# Altium PCB TU_ADV_PCB.PcbDoc (part 2 of 2)
Units mm, origin at the board's own origin, x right, y up, seen from the top; angles counter-clockwise.
Board outline 184 x 161.42 mm, 2 copper layers (Top Layer, Bottom Layer); 166 components, 184 nets, 467 pads, 141 vias.
Unrouted connection lines stored in the file: 268.
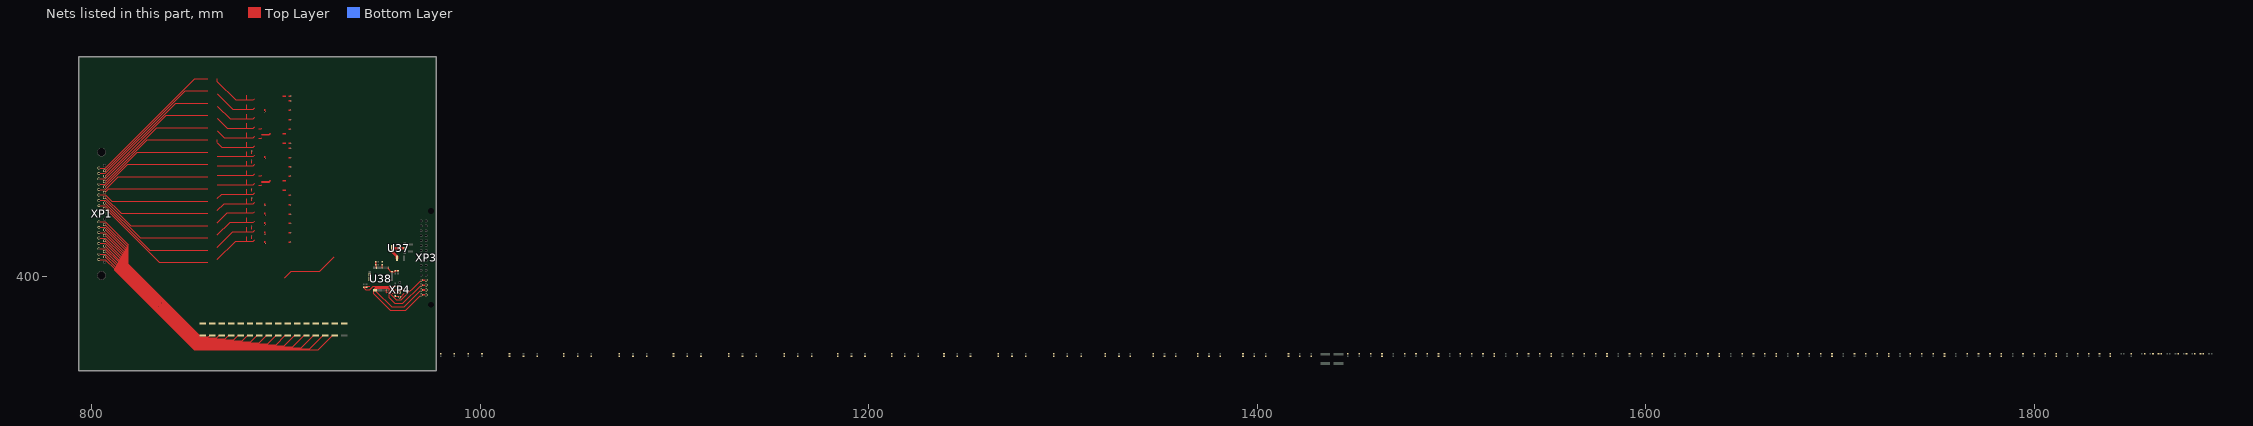
[diagram p2: the nets of this part, all layers, seen from the top]

## Via types
v1: diameter 0.7, hole 0.35, Top Layer to Bottom Layer, tented both sides, 138 vias
v2: diameter 0.85, hole 0.4, Top Layer to Bottom Layer, tented both sides, 3 vias

## Nets (pads, with @x,y where several pads share a name; then routed paths per layer and width w, separated by ;. In a path a pad name is that pad's centre, name@x,y a point inside that pad or via, vN(x,y) a via of type N, cw(c..) or ccw(c..) an arc to the next point about the centre after c; other vN are vias at no path point) (continued)
IDI_1: R87.1 XP1.20 | length 144.1
  Top Layer w0.3: XP1.20@803.76,408.714 807.174,408.714 811.907,403.982 811.907,403.273 852.824,362.356 916.711,362.356 924.061,369.706 R87.1@925.211,369.706
IDI_2: R91.1 XP1.2 | length 137
  Top Layer w0.3: XP1.2@806.6,410.099 807.174,410.099 812.407,404.867 812.407,403.48 853.031,362.856 912.361,362.856 919.211,369.706 R91.1@920.361,369.706
IDI_3: R95.1 XP1.21 | length 135.5
  Top Layer w0.3: XP1.21@803.76,411.484 807.174,411.484 812.907,405.752 812.907,403.687 853.238,363.356 908.011,363.356 914.361,369.706 R95.1@915.511,369.706
IDI_4: R99.1 XP1.3 | length 128.4
  Top Layer w0.3: XP1.3@806.6,412.869 807.174,412.869 813.407,406.637 813.407,403.894 853.445,363.856 903.661,363.856 909.511,369.706 R99.1@910.661,369.706
IDI_5: R103.1 XP1.22 | length 126.9
  Top Layer w0.3: XP1.22@803.76,414.254 807.174,414.254 813.907,407.522 813.907,404.101 853.652,364.356 899.311,364.356 904.661,369.706 R103.1@905.811,369.706
IDI_6: R107.1 XP1.4 | length 119.8
  Top Layer w0.3: XP1.4@806.6,415.639 807.174,415.639 814.407,408.407 814.407,404.308 853.859,364.856 894.961,364.856 899.811,369.706 R107.1@900.961,369.706
IDI_7: R111.1 XP1.23 | length 118.4
  Top Layer w0.3: XP1.23@803.76,417.024 807.174,417.024 814.907,409.292 814.907,404.515 854.066,365.356 890.611,365.356 894.961,369.706 R111.1@896.111,369.706
IDI_8: R115.1 XP1.5 | length 111.2
  Top Layer w0.3: XP1.5@806.6,418.409 807.174,418.409 815.407,410.177 815.407,404.723 854.273,365.856 886.261,365.856 890.111,369.706 R115.1@891.261,369.706
IDI_9: R119.1 XP1.24 | length 109.8
  Top Layer w0.3: XP1.24@803.76,419.794 807.174,419.794 815.907,411.062 815.907,404.93 854.48,366.356 881.911,366.356 885.261,369.706 R119.1@886.411,369.706
IDI_10: R123.1 XP1.6 | length 102.6
  Top Layer w0.3: XP1.6@806.6,421.179 807.174,421.179 816.407,411.947 816.407,405.137 854.688,366.856 877.561,366.856 880.411,369.706 R123.1@881.561,369.706
IDI_11: R127.1 XP1.25 | length 101.2
  Top Layer w0.3: XP1.25@803.76,422.564 807.174,422.564 816.907,412.832 816.907,405.344 854.895,367.356 873.211,367.356 875.561,369.706 R127.1@876.711,369.706
IDI_12: R131.1 XP1.7 | length 94
  Top Layer w0.3: XP1.7@806.6,423.949 807.174,423.949 817.407,413.717 817.407,405.551 855.102,367.856 868.861,367.856 870.711,369.706 R131.1@871.861,369.706
IDI_13: R135.1 XP1.26 | length 92.6
  Top Layer w0.3: XP1.26@803.76,425.334 807.174,425.334 817.907,414.602 817.907,405.758 855.309,368.356 864.511,368.356 865.861,369.706 R135.1@867.011,369.706
IDI_14: R139.1 XP1.8 | length 85.5
  Top Layer w0.3: XP1.8@806.6,426.719 807.174,426.719 818.407,415.487 818.407,405.965 855.516,368.856 860.161,368.856 861.011,369.706 R139.1@862.161,369.706
IDI_15: R143.1 XP1.27 | length 83.7
  Top Layer w0.3: XP1.27@803.76,428.104 807.174,428.104 818.907,416.372 818.907,406.172 855.373,369.706 R143.1@857.311,369.706
IDO_0: XP1.11 | length 64.8
  Top Layer w0.3: XP1.11@806.6,435.029 807.174,435.029 834.933,407.27 859.923,407.27
IDO_1: XP1.30 | length 65.6
  Top Layer w0.3: XP1.30@803.76,436.414 807.174,436.414 830.018,413.57 859.923,413.57
IDO_2: XP1.12 | length 60.7
  Top Layer w0.3: XP1.12@806.6,437.799 807.174,437.799 825.103,419.87 859.923,419.87
IDO_3: XP1.31 | length 61.6
  Top Layer w0.3: XP1.31@803.76,439.184 807.174,439.184 820.188,426.17 859.923,426.17
IDO_4: XP1.13 | length 56.7
  Top Layer w0.3: XP1.13@806.6,440.569 807.174,440.569 815.273,432.47 859.923,432.47
IDO_5: XP1.32 | length 57.5
  Top Layer w0.3: XP1.32@803.76,441.954 807.174,441.954 810.358,438.77 859.923,438.77
IDO_6: XP1.14 | length 54
  Top Layer w0.3: XP1.14@806.6,443.339 807.174,443.339 808.905,445.07 859.923,445.07
IDO_7: XP1.33 | length 58.9
  Top Layer w0.3: XP1.33@803.76,444.724 807.174,444.724 813.82,451.37 859.923,451.37
IDO_8: XP1.15 | length 58.1
  Top Layer w0.3: XP1.15@806.6,446.109 807.174,446.109 818.735,457.67 859.923,457.67
IDO_9: XP1.34 | length 63
  Top Layer w0.3: XP1.34@803.76,447.494 807.174,447.494 823.65,463.97 859.923,463.97
IDO_10: XP1.16 | length 62.2
  Top Layer w0.3: XP1.16@806.6,448.879 807.174,448.879 828.565,470.27 859.923,470.27
IDO_11: XP1.35 | length 67.1
  Top Layer w0.3: XP1.35@803.76,450.264 807.174,450.264 833.48,476.57 859.923,476.57
IDO_12: XP1.17 | length 66.3
  Top Layer w0.3: XP1.17@806.6,451.649 807.174,451.649 838.395,482.87 859.923,482.87
IDO_13: XP1.36 | length 71.1
  Top Layer w0.3: XP1.36@803.76,453.034 807.174,453.034 843.31,489.17 859.923,489.17
IDO_14: XP1.18 | length 70.3
  Top Layer w0.3: XP1.18@806.6,454.419 807.174,454.419 848.225,495.47 859.923,495.47
IDO_15: XP1.37 | length 75.2
  Top Layer w0.3: XP1.37@803.76,455.804 807.174,455.804 853.14,501.77 859.923,501.77
NetPS1_2: R5.2 | length 27.3
  Top Layer w0.6: 864.823,501.77 864.823,500.27 874.198,490.895 879.781,490.895 ; 879.781,493.32 879.781,490.895 ; 884.034,491.595 883.334,490.895 882.534,490.895 879.781,490.895
NetPS2_2: R10.2 | length 26.4
  Top Layer w0.6: 864.823,493.97 872.748,486.045 882.534,486.045 883.334,486.045 884.034,486.745 ; 879.781,486.045 879.781,488.47
  Top Layer w0.7: 901.428,490.325 v1(902.606,490.325)
NetPS3_2: R15.2 | length 24.6
  Top Layer w0.6: 864.823,487.67 871.298,481.195 882.534,481.195 883.334,481.195 884.034,481.895 ; 879.781,481.195 879.781,483.62
NetPS4_2: R20.2 | length 24
  Top Layer w0.6: 864.823,481.37 869.848,476.345 882.534,476.345 883.334,476.345 884.034,477.045 ; 879.781,476.345 879.781,478.77
NetPS5_2: R25.2 | length 23.4
  Top Layer w0.6: 864.823,475.07 868.398,471.495 882.534,471.495 883.334,471.495 884.034,472.195 ; 879.781,471.495 879.781,473.92
NetPS6_2: R30.2 | length 25.1
  Top Layer w0.6: 864.823,468.77 866.948,466.645 882.534,466.645 883.334,466.645 884.034,467.345 ; 864.823,469.194 864.823,470.27 ; 879.781,466.645 879.781,469.07
  Top Layer w0.7: 901.428,466.075 v1(902.606,466.075)
NetPS7_2: R35.2 | length 21.9
  Top Layer w0.6: 864.823,461.795 882.534,461.795 883.334,461.795 884.034,462.495 ; 879.781,461.795 879.781,464.22
NetPS8_2: R40.2 | length 21.9
  Top Layer w0.6: 864.823,456.945 882.534,456.945 883.334,456.945 884.034,457.645 ; 879.781,456.945 879.781,459.37
NetPS9_2: R45.2 | length 21.9
  Top Layer w0.6: 864.823,452.095 882.534,452.095 883.334,452.095 884.034,452.795 ; 879.781,452.095 879.781,454.52
NetPS10_2: R50.2 | length 23.1
  Top Layer w0.6: 864.823,447.245 882.534,447.245 883.334,447.245 884.034,447.945 ; 879.781,447.245 879.781,449.67
  Top Layer w0.7: 901.428,441.825 v1(902.606,441.825)
NetPS11_2: R55.2 | length 22.8
  Top Layer w0.6: 864.823,440.27 866.948,442.395 882.534,442.395 883.334,442.395 884.034,443.095 ; 879.781,442.395 879.781,444.82
NetPS12_2: R60.2 | length 23.4
  Top Layer w0.6: 864.823,433.97 868.398,437.545 882.534,437.545 883.334,437.545 884.034,438.245 ; 879.781,437.545 879.781,439.97
NetPS13_2: R65.2 | length 24
  Top Layer w0.6: 864.823,427.67 869.848,432.695 882.534,432.695 883.334,432.695 884.034,433.395 ; 879.781,432.695 879.781,435.12
NetPS14_2: R70.2 | length 24.6
  Top Layer w0.6: 864.823,421.37 871.298,427.845 882.534,427.845 883.334,427.845 884.034,428.545 ; 879.781,427.845 879.781,430.27
NetPS15_2: R75.2 | length 25.2
  Top Layer w0.6: 864.823,415.07 872.748,422.995 882.534,422.995 883.334,422.995 884.034,423.695 ; 879.781,422.995 879.781,425.42
NetPS16_2: R80.2 | length 25.8
  Top Layer w0.6: 864.823,408.77 874.198,418.145 882.534,418.145 883.334,418.145 884.034,418.845 ; 879.781,418.145 879.781,420.57
NetR2_1: R2.1 R4.2
NetR2_2: R2.2
NetR3_2: R3.2
NetR7_1: R7.1 R9.2
NetR7_2: R7.2
NetR8_2: R8.2
NetR12_1: R12.1 R14.2 | length 2.4
  Top Layer w0.7: 901.428,485.475 v1(902.606,485.475) ; 901.428,492.865 v1(902.606,492.865)
NetR12_2: R12.2 | length 1.6
  Top Layer w0.7: 898.453,492.865 900.028,492.865
NetR13_2: R13.2
NetR17_1: R17.1 R19.2 | length 1.2
  Top Layer w0.7: v1(889.108,484.868) 889.108,486.045
NetR17_2: R17.2
NetR18_2: R18.2 | length 1.2
  Top Layer w0.7: 901.428,480.625 v1(902.606,480.625)
NetR22_1: R22.1 R24.2
NetR22_2: R22.2 | length 1.2
  Top Layer w0.7: 901.428,475.775 v1(902.606,475.775)
NetR23_2: R23.2 | length 1.6
  Top Layer w0.6: 886.034,476.095 887.284,476.095 887.534,476.345
NetR27_1: R27.1 R29.2 | length 4.7
  Top Layer w0.8: 887.534,472.895 889.108,472.895 891.383,472.895 891.953,473.465
NetR27_2: R27.2 | length 1.6
  Top Layer w0.6: 886.034,471.245 887.284,471.245 887.534,471.495
NetR28_2: R28.2 | length 1.6
  Top Layer w0.7: 898.453,473.465 900.028,473.465
NetR32_1: R32.1 R34.2 | length 2.4
  Top Layer w0.7: 901.428,461.225 v1(902.606,461.225) ; 901.428,468.615 v1(902.606,468.615)
NetR32_2: R32.2 | length 1.6
  Top Layer w0.7: 898.453,468.615 900.028,468.615
NetR33_2: R33.2
NetR37_1: R37.1 R39.2 | length 1.2
  Top Layer w0.7: v1(889.108,460.618) 889.108,461.795
NetR37_2: R37.2
NetR38_2: R38.2 | length 1.2
  Top Layer w0.7: 901.428,456.375 v1(902.606,456.375)
NetR42_1: R42.1 R44.2
NetR42_2: R42.2 | length 1.2
  Top Layer w0.7: 901.428,451.525 v1(902.606,451.525)
NetR43_2: R43.2 | length 1.6
  Top Layer w0.6: 886.034,451.845 887.284,451.845 887.534,452.095
NetR47_1: R47.1 R49.2 | length 4.7
  Top Layer w0.8: 887.534,448.645 889.108,448.645 891.383,448.645 891.953,449.215
NetR47_2: R47.2 | length 1.6
  Top Layer w0.6: 886.034,446.995 887.284,446.995 887.534,447.245
NetR48_2: R48.2 | length 1.6
  Top Layer w0.7: 898.453,449.215 900.028,449.215
NetR52_1: R52.1 R54.2 | length 1.2
  Top Layer w0.7: 901.428,436.975 v1(902.606,436.975)
NetR52_2: R52.2 | length 1.6
  Top Layer w0.7: 898.453,444.365 900.028,444.365
NetR53_2: R53.2
NetR57_1: R57.1 R59.2 | length 1.2
  Top Layer w0.7: v1(889.108,436.368) 889.108,437.545
NetR57_2: R57.2
NetR58_2: R58.2 | length 1.2
  Top Layer w0.7: 901.428,432.125 v1(902.606,432.125)
NetR62_1: R62.1 R64.2 | length 1.2
  Top Layer w0.7: v1(889.108,431.518) 889.108,432.695
NetR62_2: R62.2
NetR63_2: R63.2 | length 1.2
  Top Layer w0.7: 901.428,427.275 v1(902.606,427.275)
NetR67_1: R67.1 R69.2 | length 1.2
  Top Layer w0.7: v1(889.108,426.668) 889.108,427.845
NetR67_2: R67.2
NetR68_2: R68.2 | length 1.2
  Top Layer w0.7: 901.428,422.425 v1(902.606,422.425)
NetR72_1: R72.1 R74.2 | length 1.2
  Top Layer w0.7: v1(889.108,421.818) 889.108,422.995
NetR72_2: R72.2
NetR73_2: R73.2 | length 1.2
  Top Layer w0.7: 901.428,417.575 v1(902.606,417.575)
NetR77_1: R77.1 R79.2 | length 1.2
  Top Layer w0.7: v1(889.108,416.968) 889.108,418.145
NetR77_2: R77.2
NetR78_2: R78.2
NetR81_1: R81.1 R84.1
NetR83_2: R83.2 R84.2
NetR85_1: R85.1 R88.1
NetR87_2: R87.2 R88.2
NetR89_1: R89.1 R92.1 | length 31.5
  Top Layer w0.3: 899.511,399.376 902.886,402.751 917.535,402.751 925.035,410.251
  Top Layer w0.6: 882.534,463.195 v1(882.534,464.622)
NetR91_2: R91.2 R92.2
NetR93_1: R93.1 R96.1 | length 1.4
  Top Layer w0.6: 882.534,443.795 v1(882.534,445.222)
NetR95_2: R95.2 R96.2
NetR97_1: R97.1 R100.1 | length 1.4
  Top Layer w0.6: 882.534,424.395 v1(882.534,425.822)
NetR99_2: R99.2 R100.2
NetR101_1: R101.1 R104.1
NetR103_2: R103.2 R104.2
NetR105_1: R105.1 R108.1
NetR107_2: R107.2 R108.2
NetR109_1: R109.1 R112.1
NetR111_2: R111.2 R112.2
NetR113_1: R113.1 R116.1
NetR115_2: R115.2 R116.2
NetR117_1: R117.1 R120.1
NetR119_2: R119.2 R120.2
NetR121_1: R121.1 R124.1
NetR123_2: R123.2 R124.2
NetR125_1: R125.1 R128.1
NetR127_2: R127.2 R128.2
NetR129_1: R129.1 R132.1
NetR131_2: R131.2 R132.2
NetR133_1: R133.1 R136.1
NetR135_2: R135.2 R136.2
NetR137_1: R137.1 R140.1
NetR139_2: R139.2 R140.2
NetR141_1: R141.1 R144.1
NetR143_2: R143.2 R144.2
NetR145_2: R145.2 U38.19
NetR146_2: R146.2 U38.20
NetR151_2: R151.2 U38.7 | length 1.6
  Top Layer w0.3: U38.7@949.681,404.5 R151.2@949.681,406.125
NetU34_1: U38.26
NetU34_10: U38.27
NetU34_11: U38.29
S2: U38.25
S3: U38.24
SPI1_MOSI: R148.2 U38.23
SPI1_SCK: R147.2 U38.21
SPI2_MISO: U38.35 XP3.3 XP3.30 | length 36.8
  Top Layer w0.3: U38.35@946.181,393 946.181,393.745 946.386,393.95 952.976,393.95 953.181,393.745 953.181,388.97 956.032,386.119 960.19,386.119 XP3.30@969.66,395.589
  Top Layer w0.8: XP3.30@969.681,395.589 XP3.3@972.221,395.589
SPI2_MOSI: U38.36 XP3.2 XP3.31 | length 33.2
  Top Layer w0.3: U38.36@946.681,393 946.681,392.255 954.598,384.338 960.97,384.338 XP3.31@969.681,393.049
  Top Layer w0.8: XP3.31@969.681,393.049 XP3.2@972.221,393.049
SPI2_NSS: U38.33 XP3.1 XP3.32 | length 35.7
  Top Layer w0.3: U38.33@945.181,393 945.181,391.236 953.861,382.557 961.729,382.557 XP3.32@969.681,390.509
  Top Layer w0.8: XP3.32@969.681,390.509 XP3.1@972.221,390.509
SPI2_SCK: U38.34 XP3.4 XP3.29 | length 36.4
  Top Layer w0.3: U38.34@945.681,393 945.681,393.952 946.179,394.45 953.183,394.45 953.681,393.952 953.681,390.989 956.77,387.9 959.452,387.9 XP3.29@969.681,398.129
  Top Layer w0.8: XP3.29@969.681,398.129 XP3.4@972.221,398.129
SWCLK: R149.2 U38.49 XP4.2 | length 5.6
  Top Layer w0.3: U38.49@954.681,395 957.756,395
  Top Layer w0.6: R149.2@956.306,395 958.065,395 XP4.2@958.635,394.43
SWDIO: R150.1 U38.46 XP4.3 | length 11.1
  Top Layer w0.3: U38.46@951.681,393 951.681,391.975 952.337,391.32 v1(952.381,391.32)
  Top Layer w0.6: v1(954.481,391.32) R150.1@956.306,391.32 ; R150.1@956.306,391.32 958.065,391.32 ; R150.1@956.306,391.32 958.065,391.32 ; 958.065,391.32 XP4.3@958.635,391.89 958.065,391.32
  Bottom Layer w0.6: v1(952.381,391.32) v1(954.481,391.32)
VCC_3.3V_CLEAR: C3.2 C4.2 C6.2 C7.2 C8.2 C9.2 C10.2 R82.1 R86.1 R90.1 R94.1 R98.1 R102.1 R106.1 R110.1 R114.1 R118.1 R122.1 R126.1 R130.1 R134.1 R138.1 R142.1 R150.2 R151.1 U37.2 U37.4 U38.1 U38.13 U38.32 U38.64 XP4.4 | length 57.8
  Top Layer w0.3: C7.2@940.106,394.55 940.106,394.125 941.081,393.15 943.331,393.15 945.131,394.95 953.391,394.95 955.181,393.16 960.405,393.16 ; C8.2@941.556,394.55 942.006,395 U38.32@943.181,395 ; C10.2@946.231,406.125 946.681,405.675 U38.13@946.681,404.5 ; U38.1@952.681,404.5 952.681,403.9 954.081,402.5 U38.64@954.681,402.5 955.856,402.5 C4.2@956.306,402.95
  Top Layer w0.6: 882.534,419.545 v1(882.534,420.972) ; 882.534,438.945 v1(882.534,440.372) ; 882.534,458.345 v1(882.534,459.772) ; R150.2@956.306,389.92 958.065,389.92 XP4.4@958.635,389.35 ; XP4.4@959.068,389.35 961.05,391.332
  Top Layer w0.85: C7.2@940.106,394.55 C8.2@941.556,394.55 ; C10.2@946.231,406.125 C9.2@946.231,407.575 ; C4.2@956.306,402.95 C3.2@957.756,402.95
  Top Layer w1.3: U37.4@954.931,414.639 U37.2@961.231,414.639
  Top Layer w1.5: U37.4@954.931,414.639 954.931,412.568 957.281,410.218 C6.2@957.281,409.389
pads on no net: U38.2 U38.3 U38.4 U38.5 U38.6 U38.8 U38.9 U38.10 U38.11 U38.14 U38.15 U38.16 U38.17 U38.18 U38.22 U38.28 U38.30 U38.37 U38.38 U38.39 U38.40 U38.41 U38.42 U38.43 U38.44 U38.45 U38.47 U38.48 U38.50 U38.51 U38.52 U38.53 U38.54 U38.55 U38.56 U38.57 U38.58 U38.59 U38.61 U38.62 XP1. XP1.10 XP1.19 XP3. XP3.5 XP3.6 XP3.7 XP3.8 XP3.25 XP3.26 XP3.27 XP3.28
copper on no net: | length 849.6
  Top Layer w0.3: 856.611,392.274 871.088,406.751 902.696,406.751 903.321,407.376 903.321,408.076 ; 861.461,392.274 875.438,406.251 903.466,406.251 904.591,407.376 904.591,408.076 ; 866.311,392.274 879.788,405.751 904.236,405.751 905.861,407.376 905.861,408.076 ; 871.161,392.274 884.138,405.251 905.006,405.251 907.131,407.376 907.131,408.076 ; 876.011,392.274 888.488,404.751 905.776,404.751 908.401,407.376 908.401,408.076 ; 880.861,392.274 892.838,404.251 906.546,404.251 909.671,407.376 909.671,408.076 ; 885.711,392.274 897.188,403.751 907.316,403.751 910.941,407.376 910.941,408.076 ; 890.561,392.274 901.538,403.251 908.086,403.251 912.211,407.376 912.211,408.076 ; 902.051,408.076 902.051,408.776 ; 904.591,398.676 904.591,397.644 909.961,392.274 ; 905.861,398.676 905.861,397.976 907.986,395.851 911.234,395.851 914.811,392.274 ; 907.131,398.676 907.131,397.976 908.756,396.351 915.584,396.351 919.661,392.274 ; 908.401,398.676 908.401,397.976 909.526,396.851 919.934,396.851 924.511,392.274 ; 909.671,398.676 909.671,397.976 910.296,397.351 924.284,397.351 929.361,392.274 ; 923.23,399.578 925.376,399.578 ; 923.23,428.747 926.421,428.747 926.421,412.628 ; 923.23,430.421 926.921,430.421 926.921,413.542 ; 923.23,433.826 927.421,433.826 927.421,413.749 ; 923.23,470.493 927.921,470.493 927.921,413.956
  Top Layer w0.55: 899.511,408.076 899.511,410.456 902.142,413.087 922.931,413.087 ; 900.781,408.076 900.781,409.93 902.668,411.817 922.931,411.817 ; 902.051,408.776 v1(902.051,409.751) ; 907.281,467.75 910.136,467.75 910.136,472.83 913.081,472.83 916.026,472.83 916.026,475.24 ; v1(910.136,431.49) 913.081,431.49 922.931,431.49 923.23,431.191 923.23,430.423 ; 910.941,398.676 910.941,400.589 912.268,401.916 922.931,401.916 923.23,402.215 923.23,402.982 ; 912.211,398.676 912.211,400.063 912.794,400.646 922.931,400.646 923.23,400.347 923.23,399.579 ; 913.081,430.22 v1(916.026,430.22) ; 913.081,432.76 922.931,432.76 923.23,433.059 923.23,433.827 ; 913.081,435.3 v1(908.866,435.3) 908.866,427.68 922.931,427.68 923.23,427.979 923.23,428.747 ; 913.081,437.84 916.026,437.84 ; 913.081,469.02 v1(916.026,469.02) ; 913.081,470.29 v1(914.756,470.29) ; 913.081,471.56 922.907,471.56 ; 913.081,474.1 v1(914.756,474.1) ; 913.081,476.64 916.026,476.64 ; 913.481,397.976 v1(916.026,397.976) ; 913.481,408.776 916.026,408.776 ; 922.947,471.544 923.23,471.261 923.23,470.493
  Top Layer w0.6: 882.534,434.095 v1(882.534,435.522) ; 882.534,453.495 v1(882.534,454.922) ; 882.534,472.895 v1(882.534,474.322) ; 886.034,417.895 887.284,417.895 ; 886.034,422.745 887.284,422.745 887.534,422.995 ; 886.034,427.595 887.284,427.595 887.534,427.845 ; 886.034,432.445 887.284,432.445 887.534,432.695 ; 886.034,437.295 887.284,437.295 887.534,437.545 ; 886.034,442.145 887.284,442.145 887.534,442.395 ; 886.034,456.695 887.284,456.695 887.534,456.945 ; 886.034,461.545 887.284,461.545 887.534,461.795 ; 886.034,466.395 887.284,466.395 887.534,466.645 ; 886.034,480.945 887.284,480.945 887.534,481.195 ; 886.034,485.795 887.284,485.795 887.534,486.045 ; 886.034,490.645 887.284,490.645 887.534,490.895 ; 887.284,417.895 887.534,418.145 887.284,417.895
  Top Layer w0.7: 898.453,420.115 900.028,420.115 ; 898.453,424.965 900.028,424.965 ; 898.453,434.665 900.028,434.665 ; 898.453,439.515 900.028,439.515 ; 898.453,454.065 900.028,454.065 ; 898.453,458.915 900.028,458.915 ; 898.453,463.765 900.028,463.765 ; 898.453,478.315 900.028,478.315 ; 898.453,483.165 900.028,483.165 ; 898.453,488.015 900.028,488.015 ; v1(916.026,406.199) 916.026,407.376 v1(918.778,407.376) ; 916.026,408.776 919.176,408.776 ; v1(916.026,439.017) 916.026,437.84 919.176,437.84 ; 916.026,475.24 v1(918.778,475.24) ; v1(916.026,477.817) 916.026,476.64 919.176,476.64 ; 920.576,437.84 v1(921.753,437.84) ; 920.576,476.64 v1(921.753,476.64) ; v1(920.653,399.578) 921.83,399.578 ; v1(920.653,402.984) 921.83,402.984 ; v1(920.653,428.748) 921.83,428.748 ; v1(920.653,430.422) 921.83,430.422 ; v1(920.653,433.828) 921.83,433.828 ; v1(920.653,470.493) 921.83,470.493
  Top Layer w0.8: 887.534,419.545 889.108,419.545 891.383,419.545 891.953,420.115 ; 887.534,424.395 889.108,424.395 891.383,424.395 891.953,424.965 ; 887.534,429.245 889.108,429.245 891.383,429.245 891.953,429.815 ; 887.534,434.095 889.108,434.095 891.383,434.095 891.953,434.665 ; 887.534,438.945 889.108,438.945 891.383,438.945 891.953,439.515 ; 887.534,443.795 889.108,443.795 891.383,443.795 891.953,444.365 ; 887.534,453.495 889.108,453.495 891.383,453.495 891.953,454.065 ; 887.534,458.345 889.108,458.345 891.383,458.345 891.953,458.915 ; 887.534,463.195 889.108,463.195 891.383,463.195 891.953,463.765 ; 887.534,468.045 889.108,468.045 891.383,468.045 891.953,468.615 ; 887.534,477.745 889.108,477.745 891.383,477.745 891.953,478.315 ; 887.534,482.595 889.108,482.595 891.383,482.595 891.953,483.165 ; 887.534,487.445 889.108,487.445 891.383,487.445 891.953,488.015 ; 887.534,492.295 889.108,492.295 891.383,492.295 891.953,492.865

## Polygon pours and split planes (outlines as drawn)
no net on Bottom Layer "1" (solid, shelved, pour order 63): 921.403,476.99 921.898,476.99 933.041,465.847 933.041,426.813 941.853,426.813 941.853,422.971 932.641,422.971 932.641,419.169 921.898,408.426 921.403,408.426
+12V_CLEAR on Bottom Layer "1" (solid, shelved, pour order 73): 889.944,498.675 930.88,498.675 954.726,474.829 954.726,448.498 960.156,448.498 960.156,443.438 954.726,443.438 949.666,443.438 949.666,472.733 928.784,493.615 895.003,493.615 895.003,414.506 889.943,414.506
no net on Bottom Layer "NONET_L02_P061" (solid, shelved, pour order 61): 941.853,426.813 939.48,426.813 939.48,418.439 941.853,418.439
GND on Bottom Layer "1" (solid, shelved, pour order 30): 949.266,472.567 949.266,443.038 958.703,443.038 958.703,397.94 928.678,397.94 928.678,403.169 942.253,416.744 942.253,427.213 933.441,427.213 933.441,466.012 922.064,477.39 921.003,477.39 921.003,407.5 921.538,407.5 933.041,419.004 933.041,422.571 939.08,422.571 939.08,418.058 925.505,404.483 925.505,397.94 921.006,397.94 916.776,397.94 904.234,397.94 904.236,493.215 928.619,493.215
GND on Bottom Layer "1" (solid, shelved, pour order 81): 807.75,456.593 824.079,472.921 802.195,494.805 802.195,504.135 805.257,504.135 830.275,479.117 855.293,504.135 885.936,504.135 885.936,499.075 879.739,499.075 879.738,397.94 844.052,397.94 808.647,433.344 807.75,433.344
+12V_CLEAR on Bottom Layer "1" (solid, shelved, pour order 79): 880.139,498.675 885.199,498.675 885.199,416.218 895.003,416.218 895.003,397.94 880.138,397.94
E.GND2 on Bottom Layer "Bottom Layer-E.GND" (solid, shelved, pour order 77): 808.75,431.174 810.251,431.174 823.817,417.608 854.177,387.249 894.756,387.249 894.756,380.262 891.609,380.262 891.609,361.706 852.585,361.706 808.75,405.541
GND on Bottom Layer "1" (solid, shelved, pour order 67): 885.599,504.135 933.142,504.135 960.186,477.091 960.186,455.774 955.126,455.774 955.126,474.994 931.046,499.075 889.543,499.075 889.543,416.618 885.599,416.618
GND on Bottom Layer "1" (solid, shelved, pour order 65): 895.403,493.215 904.856,493.215 904.856,397.94 895.403,397.94
no net on Bottom Layer "1" (solid, shelved, pour order 69): 930.486,397.54 930.486,393.726 848.265,393.726 844.452,397.54
GND on Bottom Layer "1" (solid, shelved, pour order 71): 848.665,393.326 930.886,393.326 930.886,398.29 958.703,398.29 958.703,387.648 854.343,387.648
E.GND1 on Bottom Layer "Bottom Layer-E.GND" (solid, shelved, pour order 75): 895.156,387.249 932.289,387.249 932.289,361.706 892.009,361.706 892.009,379.862 895.156,379.862
VCC_3.3V_CLEAR on Top Layer "Top Layer-+3V3" (solid, pour order 103): 955.861,402.525 960.181,402.525 960.181,390.039 962.181,392.039 962.181,410.689 942.581,410.689 942.581,407 955.862,407

## Keep-outs
Keep-Out Layer:
  lines w0.5: 793.56,351.548 793.56,512.971 977.56,512.971 977.56,449.997 977.56,351.548 793.56,351.548

## Other copper
Top Layer:
  rectangle net +12V: 969.681,426.069 972.221,428.609
  rectangle net GND_12V: 969.681,420.989 972.221,423.529
  rectangle net +5V: 969.681,415.909 972.221,418.449
  rectangle net GND: 969.681,410.829 972.221,413.369
  rectangle net +5V: 960.481,416.289 969.681,417.789
  region net VCC_3.3V_CLEAR: 956.531,409.389 956.531,408.089 958.031,408.089 958.031,409.389
  pour cut-out: 955.311,410.703 956.451,409.564 956.663,409.776 955.524,410.915

## Silkscreen, mask and mechanical layers (free items; w line width, h text height)
Top Overlay:
  lines w0.2: 794.05,357.359 795.05,357.359 ; 794.05,507.159 795.05,507.159 ; 795,357.359 977.07,357.359 ; 795,507.159 977.07,507.159
  text "TS-TU" at 962.56,354.798 h3
  text "REV.ADV.0.1" at 962.56,352.798 h3
Mechanical 3:
  lines w0.05: 956.531,410.889 956.531,409.389 958.031,409.389 ; 956.766,409.673 955.706,410.733 956.766,411.794 ; 964.281,412.189 964.281,412.889 965.431,412.889 ; 960.781,409.389 961.931,409.389 960.781,409.389 ; 960.781,409.389 960.781,408.689 960.781,409.389